# Altium PCB PCBGame.PcbDoc
Units mil, origin at the board's own origin, x right, y up, seen from the top; angles counter-clockwise.
Board outline 4244.09 x 3937.01 mil, 2 copper layers (Top Layer, Bottom Layer), stack 61.811 mil thick; 24 components, 35 nets, 183 pads, 51 vias.
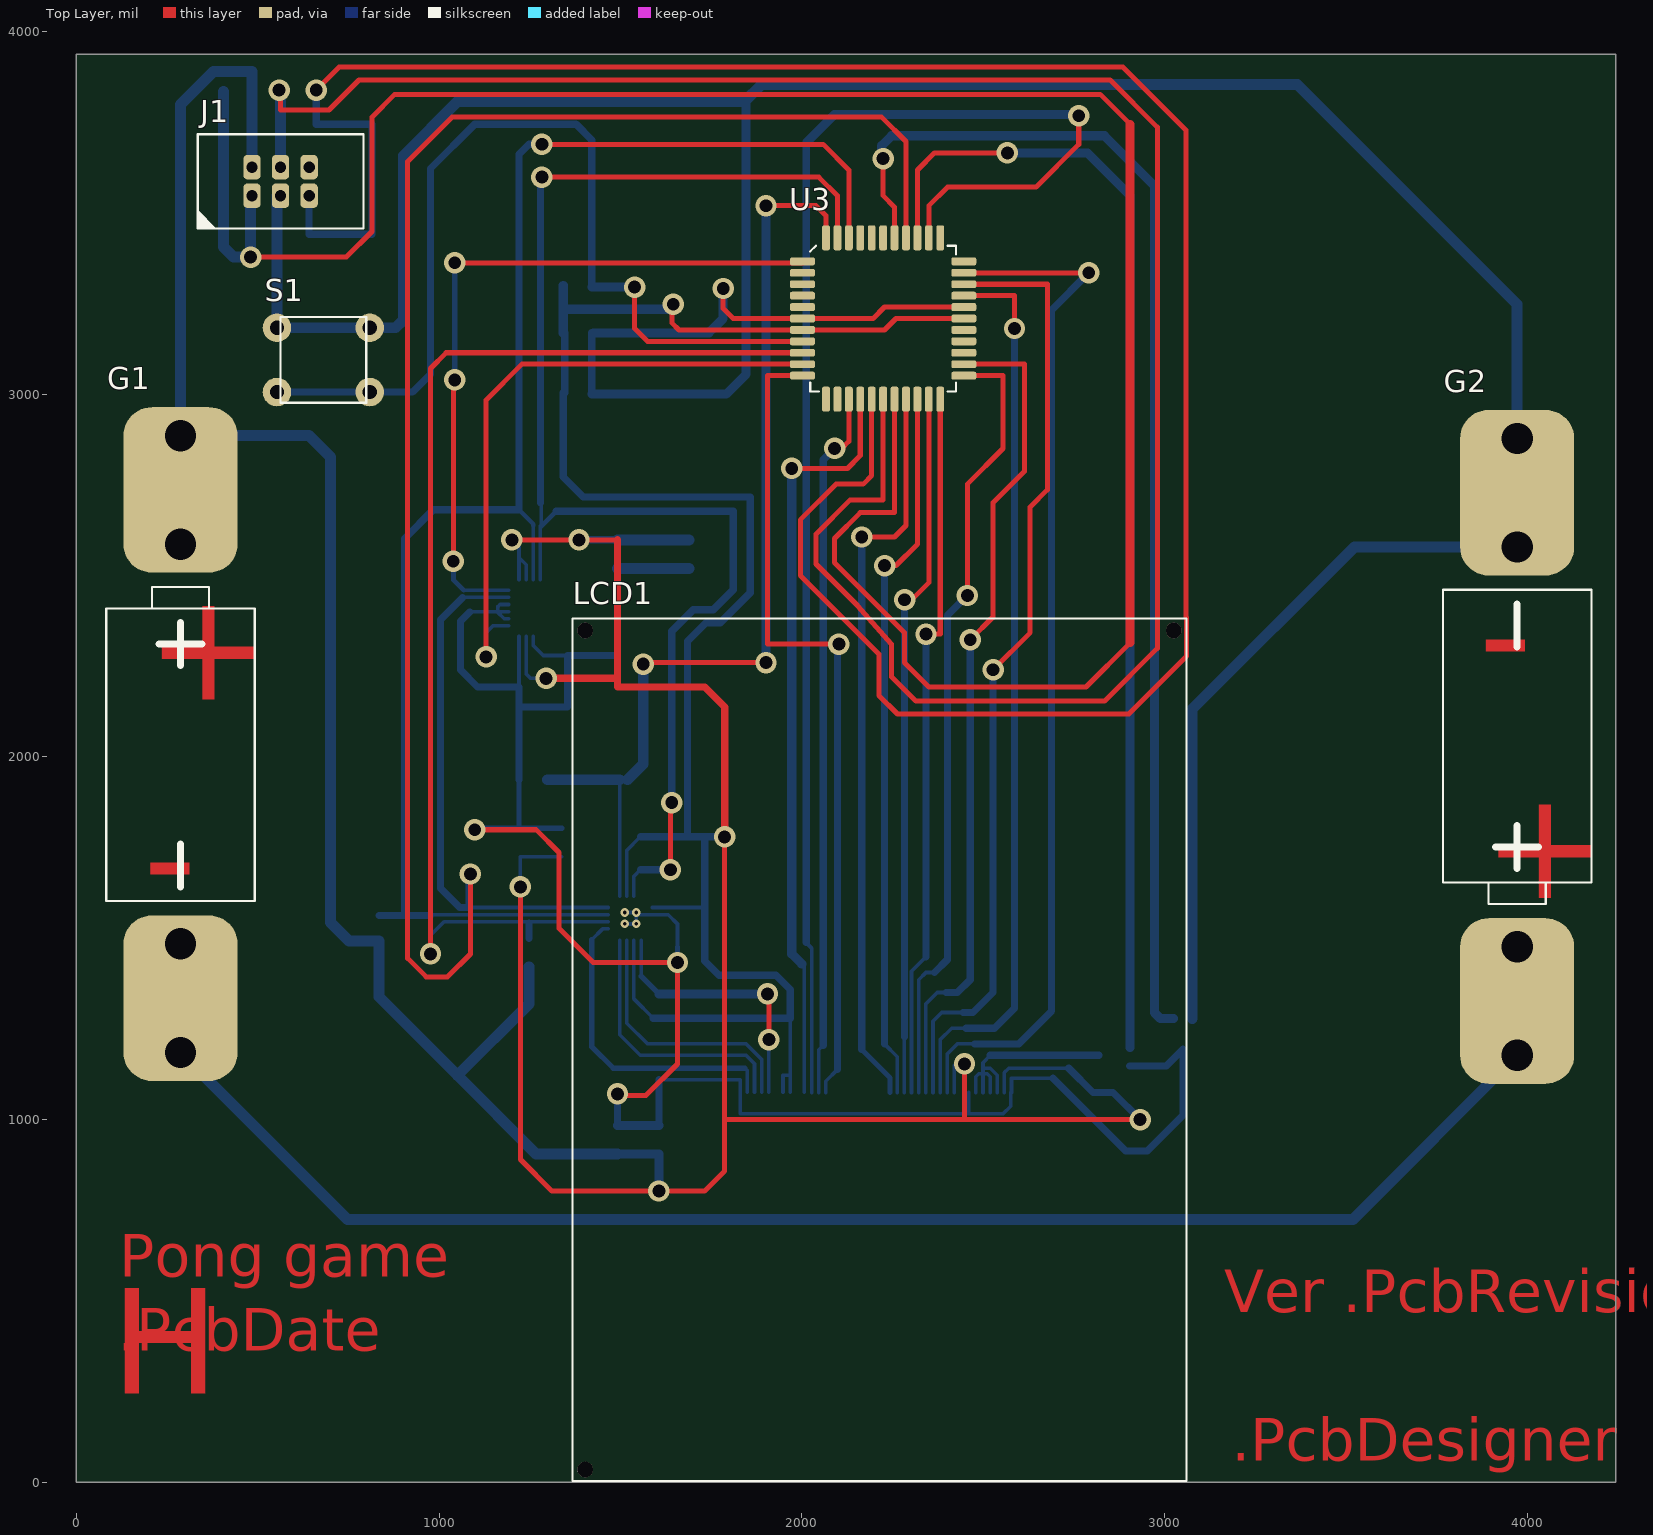
[diagram p0: Top Layer view]
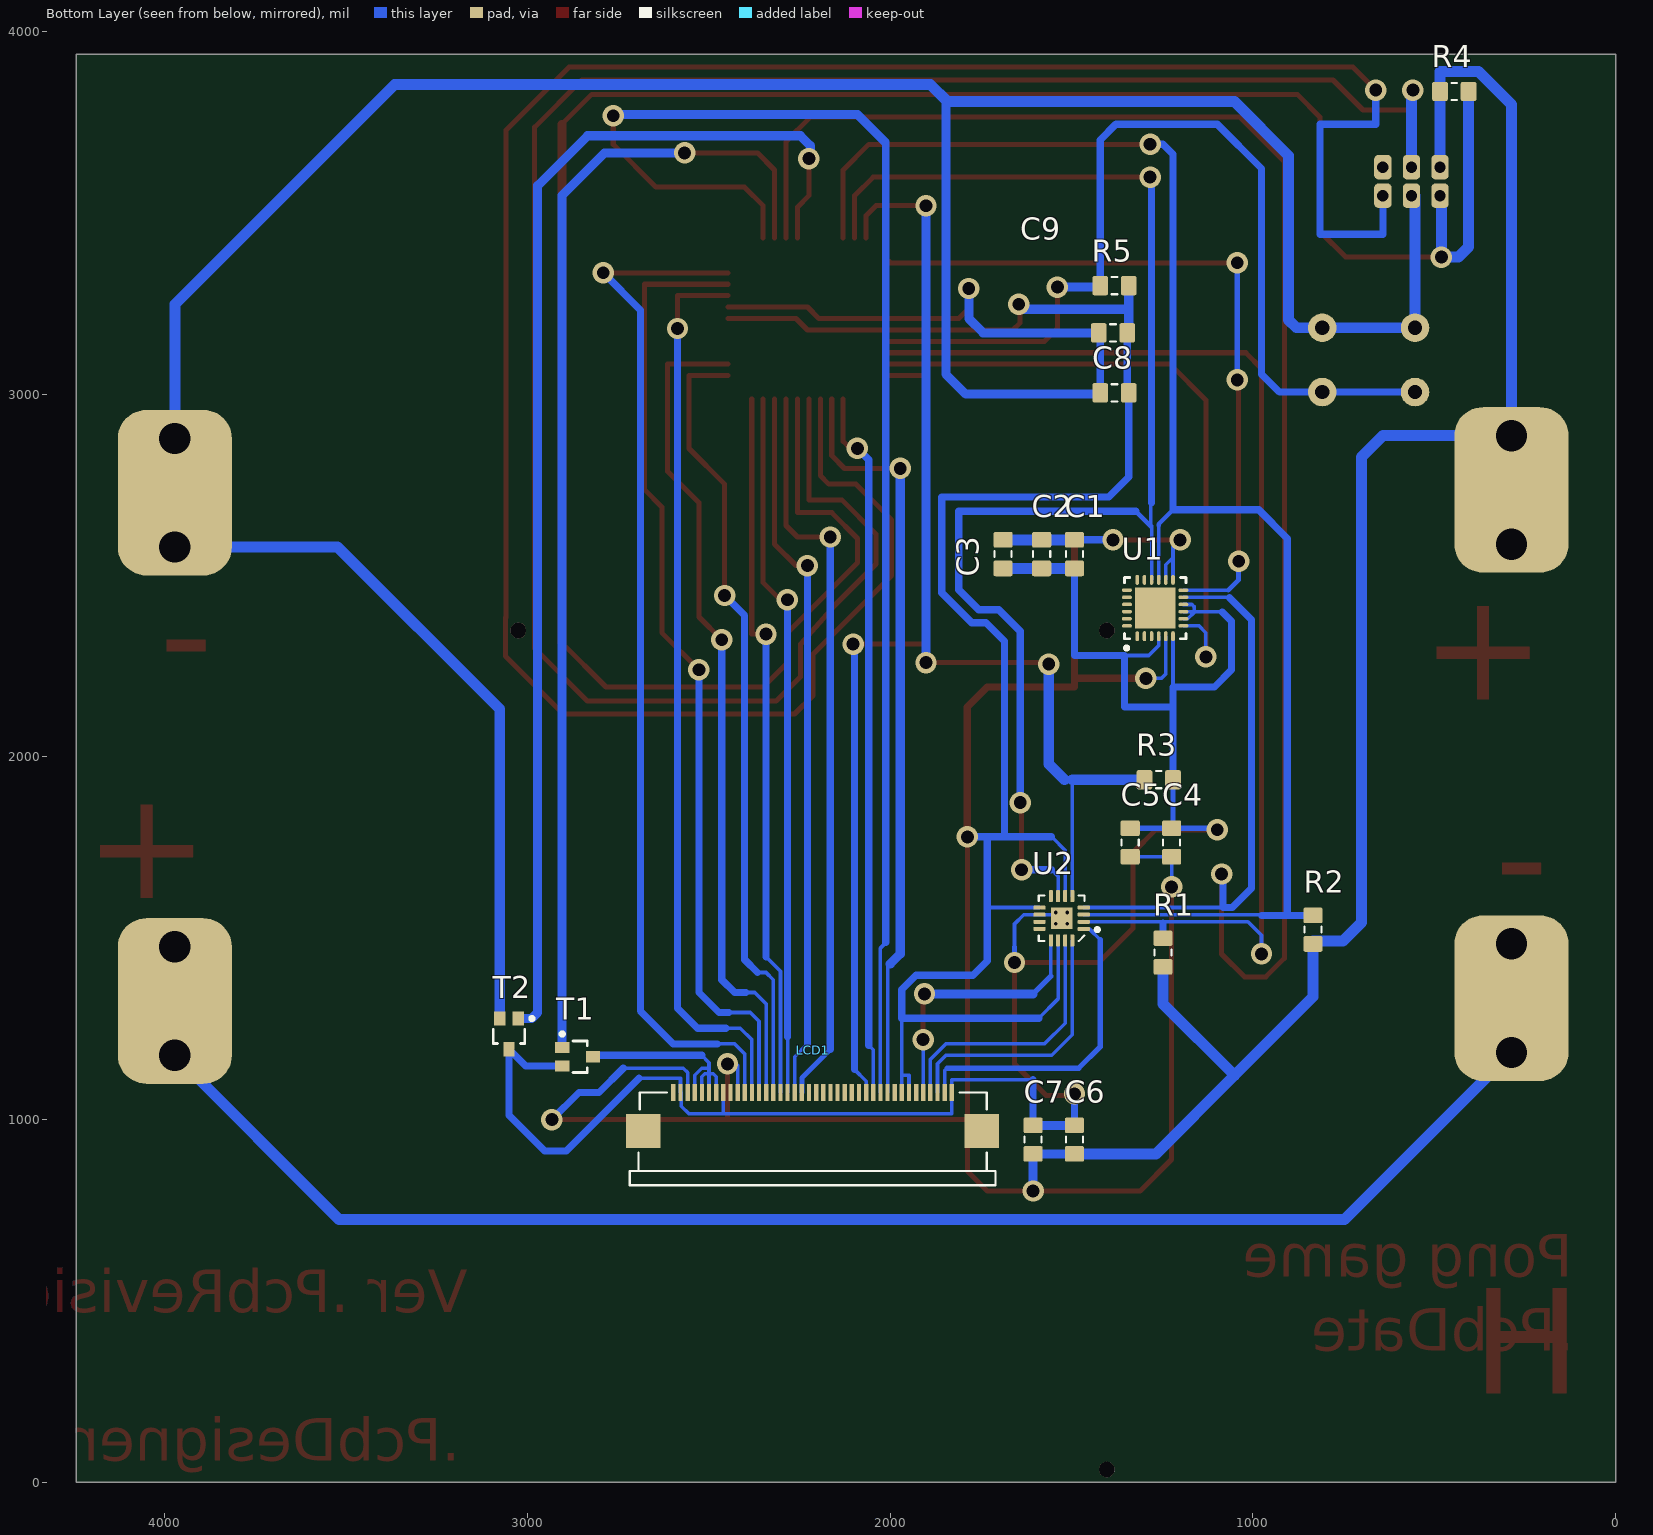
[diagram p1: Bottom Layer view, seen from below]

## Layer stack, top to bottom
Top Layer: signal copper 1.378
Dielectric 1: core 59.0551, FR-4, Dk 4.2
Bottom Layer: signal copper 1.378

## Board outline
0,0 4244.09,0 4244.09,3937.01 0,3937.01

## Design rules (kind name [scope] priority, off if disabled: settings)
AcuteAngle [All] p1: minimum=9.00000000000000E+0001 checktracksonly=TRUE
AssemblyTestPointUsage [All] p1 off:
AssemblyTestpoint [All] p1 off: testpointundercomponent=TRUE minsize=40 maxsize=100 preferedsize=60 minholesize=0 maxholesize=40 preferedholesize=32 testpointgrid=1 usegrid=TRUE gridtolerance=0.01 allowsidetop=TRUE allowsidebottom=TRUE
BoardOutlineClearance [All] p1 off: gap=9.84 ignorepadtopadclearanceinfootprint=FALSE
Clearance [All] p1: gap=0.2 ignorepadtopadclearanceinfootprint=FALSE except(0: Arc-Hole Track-Hole SMDPad-Hole THPad-Hole Via-Hole Fill-Hole Poly-Hole Region-Hole Text-Hole)
ComponentClearance [All] p1 off: gap=9.84 collisioncheckmode=3 verticalgap=9.84 showdistances=FALSE
DiffPairsRouting [All] p1 off: maxlimit=10 minlimit=10 mostfreqgap=10 toplayer_minwidth=15 toplayer_maxwidth=15 toplayer_prefwidth=15 bottomlayer_minwidth=15 bottomlayer_maxwidth=15 bottomlayer_prefwidth=15 maxuncoupledlength=500
FabricationTestPointUsage [All] p1 off: valid=0 allowmultiple=FALSE
FabricationTestpoint [All] p1 off: side=3 testpointundercomponent=TRUE minsize=40 maxsize=100 preferedsize=60 minholesize=0 maxholesize=40 preferedholesize=32 testpointgrid=1 allowsidetop=TRUE allowsidebottom=TRUE usegrid=TRUE gridtolerance=0.01
FanoutControl Fanout_BGA [IsBGA] p1 off: bgadir=Out bgaviamode=Centered fanoutstyle=Auto fanoutdirection=Alternating viagrid=1 // Fanout_BGA (Default Rule)
FanoutControl Fanout_LCC [IsLCC] p2 off: bgadir=Out bgaviamode=Centered fanoutstyle=Auto fanoutdirection=Alternating viagrid=1 // Fanout_LCC (Default Rule)
FanoutControl Fanout_SOIC [IsSOIC] p3 off: bgadir=Out bgaviamode=Centered fanoutstyle=Auto fanoutdirection=Alternating viagrid=1 // Fanout_SOIC (Default Rule)
FanoutControl Fanout_Small [(CompPinCount < 5)] p4 off: bgadir=Out bgaviamode=Centered fanoutstyle=Auto fanoutdirection=OutThenIn viagrid=1 // Fanout_Small (Default Rule)
FanoutControl Fanout_Default [All] p5 off: bgadir=Out bgaviamode=Centered fanoutstyle=Auto fanoutdirection=Alternating viagrid=1 // Fanout_Default (Default Rule)
Height [All] p1 off: minheight=0 maxheight=1000 prefheight=500
HoleSize [All] p1 off: absolutevalues=TRUE maxlimit=118.11 minlimit=5.91 maxpercent=80.000 minpercent=20.000
HoleToHoleClearance [All] p1 off: gap=9.84 allowstackedmicrovias=TRUE
LayerPairs [All] p1 off: enforce=TRUE
MinimumAnnularRing [All] p1 off: minimumring=13.78
MinimumSolderMaskSliver [All] p1 off: minsoldermaskwidth=0
PasteMaskExpansion [All] p1 off: expansion=0
PlaneClearance [All] p1: clearance=9.84
PlaneConnect [All] p1 off: planeconnectstyle=Relief reliefexpansion=19.68 reliefentries=4 reliefconductorwidth=9.84 reliefairgap=9.84
PolygonConnect [All] p1 off: connectstyle=Relief reliefconductorwidth=9.84 reliefentries=4 polygonreliefangle="90 Angle" airgapwidth=9.84
RoutingCorners [All] p1 off: cornerstyle=45-Degree minsetback=98.43 maxsetback=98.43
RoutingLayers [All] p1 off: top layer_v5=TRUE bottom layer_v5=TRUE
RoutingPriority [All] p1 off: routingpriority=0
RoutingTopology [All] p1 off: topology=Shortest
RoutingVias [All] p1: holewidth=35.43 width=59.06 viastyle="Through Hole" minholewidth=35.43 minwidth=59.06 maxholewidth=35.43 maxwidth=59.06
SilkToBoardRegionClearance [All] p1 off:
SilkToSilkClearance [All] p1 off: silktosilkclearance=0
SilkToSolderMaskClearance [IsPad] p1 off: minsilkscreentomaskgap=0 clearancetoexposedcopper=TRUE
SolderMaskExpansion [All] p1 off: expansion=0
Width [All] p1: maxlimit=157.48 minlimit=5.91 preferedwidth=9.84
4 further rules are at their usual default settings.

## Components (designator, comment, footprint, x,y, rotation, side; value= is the part's Value field where it differs from the comment)
C1 "100nF" "CAPACITOR 2012 REFLOW" 1492.13,2559.06 r90 bottom
C2 "100nF" "CAPACITOR 2012 REFLOW" 1582.68,2559.06 r90 bottom
C3 "100nF" "CAPACITOR 2012 REFLOW" 1688.98,2559.06 r90 bottom
C4 "100nF" "CAPACITOR 2012 REFLOW" 1224.41,1763.78 r270 bottom
C5 "100nF" "CAPACITOR 2012 REFLOW" 1338.58,1763.78 r270 bottom
C6 "100nF" "CAPACITOR 2012 REFLOW" 1492.13,944.88 r270 bottom
C7 "100nF" "CAPACITOR 2012 REFLOW" 1606.3,944.88 r270 bottom
C8 "100nF" "CAPACITOR 2012 REFLOW" 1381.89,3003.94 r180 bottom
C9 "100nF" "CAPACITOR 2012 REFLOW" 1385.83,3169.29 r180 bottom
G1 "Battery cell D10.5 L44.5" "1.5V Cell AAA/LR03" 287.23,2035.43 r270 top
G2 "Battery cell D10.5 L44.5" "1.5V Cell AAA/LR03" 3972.44,2027.56 r90 top
J1 "FlatCable2x3" "FlatCable2x3 2MM Straight TH FCI 98414-G06-06ULF" 562.99,3586.61 r0 top
LCD1 "LCD-NHD-2.4-240320SF" LCD-NHD-2.4-240320SF 2214.17,1074.8 r0 top
R1 "10k" "RESISTOR 2012 REFLOW" 1248.03,1460.63 r270 bottom
R2 "10k" "RESISTOR 2012 REFLOW" 834.65,1523.62 r270 bottom
R3 "10k" "RESISTOR 2012 REFLOW" 1259.84,1937.01 r0 bottom
R4 "10k" "RESISTOR 2012 REFLOW" 444.88,3834.65 r0 bottom
R5 "10k" "RESISTOR 2012 REFLOW" 1381.89,3299.21 r180 bottom
S1 "User" "Push Button C6.0x6.0 WE 430186130716" 681.1,3094.49 r180 top
T1 "PMF370XN" SOT65P210X110-3N 2862.2,1173.23 r180 bottom
T2 "PMF370XN" SOT65P210X110-3N 3051.18,1236.22 r270 bottom
U1 "Component_1" accelerometer 1269.68,2410.43 r90 bottom
U2 "STMPE811" "QFN16 P0.5 T1.5x1.5 C3.0x3.0 H1.0" 1527.56,1555.12 r0 bottom
U3 "PIC18F46K20-_/PT" "TQFP44 P0.8 C10X10 H1.2" 2224.41,3208.66 r0 top

## Footprints (in the part's own frame and the unit in brackets; to place one, negate y for a bottom-side part, rotate by r counter-clockwise, add the part's x,y. Pads: shape width x height; smd on the part's side, far side on the other; paste and mask are expansions set on the pad)
"1.5V Cell AAA/LR03" [mm] "Battery Cell D10.5 L44.5"
  rrect50% 8x8 hole 2.2 copper offset 2,0: 1(-21.6,0) 2(14,0)
  rrect50% 8x8 hole 2.2 copper offset -2,0: 1(-14,0) 2(21.6,0)
  silkscreen extent -11,-5.2 11,5.2, body extent -24,-5.4 24,5.4, height 13.5
accelerometer [mm] "QFN, 24-Leads, Body 4.00x4.00mm, Pitch 0.50mm, Thermal Pad 2.85x2.85mm, IPC Medium Density"
  oval 0.7x0.25 smd: 1(-1.975,1.25) 2(-1.975,0.75) 3(-1.975,0.25) 4(-1.975,-0.25) 5(-1.975,-0.75) 6(-1.975,-1.25) 13(1.975,-1.25) 14(1.975,-0.75) 15(1.975,-0.25) 16(1.975,0.25) 17(1.975,0.75) 18(1.975,1.25)
  oval 0.25x0.7 smd: 7(-1.25,-1.975) 8(-0.75,-1.975) 9(-0.25,-1.975) 10(0.25,-1.975) 11(0.75,-1.975) 12(1.25,-1.975) 19(1.25,1.975) 20(0.75,1.975) 21(0.25,1.975) 22(-0.25,1.975) 23(-0.75,1.975) 24(-1.25,1.975)
  rect 2.85x2.85 smd: 25(0,0)
  silkscreen extent -2.92,-2.15 2.15,2.15, body extent -2,-2 2,2, height 1.8
"CAPACITOR 2012 REFLOW" [mm] "Capacitor SMD 2.0x1.2mm (0805-imperial)"
  rrect25% 1.1x1.35 smd: 1(-1,0) 2(1,0)
  silkscreen extent -0.2,-0.6 0.2,0.6, body extent -1,-0.6 1,0.6, height 1
"FlatCable2x3 2MM Straight TH FCI 98414-G06-06ULF" [mm] "FlatCable2x3 2MM Straight TH FCI 98414-G06-06ULF"
  rrect50% 1.219x1.727 hole 0.8: 1(-2,-1) 2(-2,1) 3(0,-1) 4(0,1) 5(2,-1) 6(2,1)
  silkscreen extent -5.8,-3.3 5.8,3.3, body extent -4,-3 4,3, height 5.9
LCD-NHD-2.4-240320SF [mm] "LCD-NHD-2.4-240320SF"
  round 1.1 hole 1.1 paste-25.4 mask-25.4: 0(-20.61,-26.41) 0(-20.61,32.35) 0(20.61,32.35)
  rect 2.4x2.4 smd far side: 0(-11.85,-2.7) 0(11.86,-2.7)
  rect 0.3x1.2 smd far side: 1(-9.75,0) 2(-9.25,0) 3(-8.75,0) 4(-8.25,0) 5(-7.75,0) 6(-7.25,0) 7(-6.75,0) 8(-6.25,0) 9(-5.75,0) 10(-5.25,0) 11(-4.75,0) 12(-4.25,0) 13(-3.75,0) 14(-3.25,0) 15(-2.75,0) 16(-2.25,0) 17(-1.75,0) 18(-1.25,0) 19(-0.75,0) 20(-0.25,0) 21(0.25,0) 22(0.75,0) 23(1.25,0) 24(1.75,0) 25(2.25,0) 26(2.75,0) 27(3.25,0) 28(3.75,0) 29(4.25,0) 30(4.75,0) 31(5.25,0) 32(5.75,0) 33(6.25,0) 34(6.75,0) 35(7.25,0) 36(7.75,0) 37(8.25,0) 38(8.75,0) 39(9.25,0) 40(9.75,0)
  silkscreen extent -21.5,-27.2 21.5,33.2, body extent -21.43,-27.17 21.43,33.18, height 3.87
"Push Button C6.0x6.0 WE 430186130716" [mm] "Push Button Wurth Elektronik 430186130716"
  round 2 hole 1: 1(-3.25,2.25) 2(-3.25,-2.25) 3(3.25,2.25) 4(3.25,-2.25)
  silkscreen extent -3,-3 3,3, body extent -3.4,-3.1 3.4,3.1, height 15
"QFN16 P0.5 T1.5x1.5 C3.0x3.0 H1.0" [mm] "QFN16 P0.5 T1.5x1.5 C3.0x3.0 H1.0"
  rrect50% 0.85x0.28 smd: 1(-1.55,0.75) 2(-1.55,0.25) 3(-1.55,-0.25) 4(-1.55,-0.75) 9(1.55,-0.75) 10(1.55,-0.25) 11(1.55,0.25) 12(1.55,0.75)
  rrect50% 0.28x0.85 smd: 5(-0.75,-1.55) 6(-0.25,-1.55) 7(0.25,-1.55) 8(0.75,-1.55) 13(0.75,1.55) 14(0.25,1.55) 15(-0.25,1.55) 16(-0.75,1.55)
  rect 1.5x1.5 smd: 17(0,0)
  silkscreen extent -2.62,-1.6 1.6,1.6, body extent -1.5,-1.5 1.5,1.5, height 1.01
"RESISTOR 2012 REFLOW" [mm] "Resistor SMD 2.0x1.2mm (0805-imperial)"
  rrect25% 1.1x1.35 smd: 1(-1,0) 2(1,0)
  silkscreen extent -0.2,-0.6 0.2,0.6, body extent -1,-0.6 1,0.6, height 0.6
SOT65P210X110-3N [mm] "SOT23, 3-Leads, Body 2.00x2.10mm, Pitch 0.65mm, IPC Medium Density"
  rect 1x0.8 smd: 1(-1.075,0.65) 2(-1.075,-0.65) 3(1.075,0)
  silkscreen extent -1.2,-1.1 0.67,1.72, body extent -0.67,-1.1 0.67,1.1, height 1.1
"TQFP44 P0.8 C10X10 H1.2" [mm] "Thin QFP, 44-Leads, Body 10x10mm, Pitch 0.8mm, IPC Medium Density"
  rrect50% 1.75x0.55 smd: 1(-5.65,4) 2(-5.65,3.2) 3(-5.65,2.4) 4(-5.65,1.6) 5(-5.65,0.8) 6(-5.65,0) 7(-5.65,-0.8) 8(-5.65,-1.6) 9(-5.65,-2.4) 10(-5.65,-3.2) 11(-5.65,-4) 23(5.65,-4) 24(5.65,-3.2) 25(5.65,-2.4) 26(5.65,-1.6) 27(5.65,-0.8) 28(5.65,0) 29(5.65,0.8) 30(5.65,1.6) 31(5.65,2.4) 32(5.65,3.2) 33(5.65,4)
  rrect50% 0.55x1.75 smd: 12(-4,-5.65) 13(-3.2,-5.65) 14(-2.4,-5.65) 15(-1.6,-5.65) 16(-0.8,-5.65) 17(0,-5.65) 18(0.8,-5.65) 19(1.6,-5.65) 20(2.4,-5.65) 21(3.2,-5.65) 22(4,-5.65) 34(4,5.65) 35(3.2,5.65) 36(2.4,5.65) 37(1.6,5.65) 38(0.8,5.65) 39(0,5.65) 40(-0.8,5.65) 41(-1.6,5.65) 42(-2.4,5.65) 43(-3.2,5.65) 44(-4,5.65)
  silkscreen extent -5.1,-5.1 5.1,5.1, body extent -5,-5 5,5, height 1.21

## Part data
C1 C2 C3 C4 C5 C6 C7 C8 C9: library part Capacitor, "Capacitor"
G1 G2: library part Battery, "Battery Generic", Supplier Part Number 1=36-82-ND, Supplier 1=Digi-Key
LCD1: "NEWHEAVEN LCD", Supplier Part Number 1=NHD-2.4-240320CF-CTXI#-F-ND, Supplier 1=Digi-Key
R1 R2 R3 R4 R5: library part Resistor, "Resistor"
S1: library part "Push Button 4Pins", "Push Button, 4 pins, 2 poles parrallèle", Supplier Part Number 1=401-1433-ND, Supplier 1=Digi-Key
T1: library part Component_2
T2: library part Component_2, Supplier Part Number 1=1758096, Supplier 1=Farnell
U2: library part STMPE811Q, "Advanced resistive touch screen controller  with 8-bit GPIO expander", Supplier Part Number 1=2807110, Supplier 1=Farnell
U3: "Flash Microcontrollers  with 10-Bit A/D and nanoWatt Technology", Supplier Part Number 1=1439591, Supplier 1=Farnell

## Via types
v1: diameter 59.06, hole 35.43, Top Layer to Bottom Layer, 47 vias
v2: diameter 23.62, hole 9.84, Top Layer to Bottom Layer, 4 vias

## Nets (pads, with @x,y where several pads share a name; then routed paths per layer and width w, separated by ;. In a path a pad name is that pad's centre, name@x,y a point inside that pad or via, vN(x,y) a via of type N, cw(c..) or ccw(c..) an arc to the next point about the centre after c; other vN are vias at no path point)
CTRL_GND: C1.1 C2.1 C3.1 C4.1 C5.1 C6.1 C7.1 LCD1.1 LCD1.33 LCD1.39 R3.1 T1.2 T2.3 U1.4 U1.6 U1.8 U1.9 U1.10 U2.10 U2.17 | length 6425.8
  Top Layer w14: v1(1098.43,1799.21) 1267.72,1799.21 1330.71,1736.22 1330.71,1527.56 1425.2,1433.07 v1(1657.48,1433.07) ; v1(1492.13,1070.87) 1492.13,1066.93 1570.87,1066.93 1657.48,1153.54
  Top Layer w15: 1657.48,1153.54 v1(1657.48,1433.07)
  Bottom Layer w9.84: 1084.65,2399.61 1161.42,2399.61 1161.42,2413.39 1167.32,2419.29 ; 1261.81,2305.12 1287.4,2279.53 1354.33,2279.53 ; U2.17@1543.31,1564.96 U2.10 1631.89,1564.96 1657.48,1539.37 1657.48,1476.38
  Bottom Layer w10: 1167.32,2419.29 1168.31,2420.28 U1.10 ; U1.8 1180.12,2380.91 1161.42,2399.61 1162.4,2400.59 U1.9 ; 1220.47,2192.91 U1.6 ; U1.4 1259.84,2307.09 1261.81,2305.12 ; v2(1511.81,1539.37) v2(1543.31,1539.37) 1543.31,1564.96 v2(1543.31,1570.87) v2(1511.81,1570.87) ; 1606.3,1110.24 1830.31,1110.24 LCD1.1 1830.31,1015.75 2460.24,1015.75 ; LCD1.33 2460.24,1015.75 ; 2692.91,1114.17 2578.35,1114.17 LCD1.39 2576.44,1074.8 2576.44,1037.07 2555.12,1015.75 2460.24,1015.75
  Bottom Layer w14: v1(1098.43,1799.21) 1098.43,1803.15 C4.1@1220.47,1803.15 ; R3.1 C4.1@1220.47,1803.15 ; C5.1 C4.1 C4.1@1220.47,1803.15 ; v1(1657.48,1433.07) 1657.48,1476.38
  Bottom Layer w20: 1084.65,2399.61 1059.06,2374.02 1059.06,2240.16 1106.3,2192.91 1220.47,2192.91 1220.47,2137.8 ; R3.1 1220.47,2047.24 1220.47,2137.8 ; C6.1 v1(1492.13,1070.87) ; C1.1 1492.13,2279.53 1354.33,2279.53 1354.33,2137.8 1220.47,2137.8 ; C7.1 1606.3,1110.24 ; 2692.91,1114.17 2893.7,913.39 2952.76,913.39 3051.18,1011.81 T2.3 3004.92,1147.64 T1.2
  Bottom Layer w25: C6.1 C7.1
  Bottom Layer w30: C1.1 C2.1 C3.1
GND: C8.1 C9.1 G2.2 J1.3 S1.2 S1.4 T2.2 U3.6 U3.29 | length 9768.5
  Top Layer w14: v1(1783.46,3291.34) 1783.46,3236.22 1811.02,3208.66 U3.6 2196.85,3208.66 2228.35,3240.16 U3.29
  Bottom Layer w14: J1.3@553.15,3547.24 J1.3 ; C8.1@1421.26,3000 C8.1 ; C9.1@1421.26,3169.29 C9.1 ; 1842.52,3807.09 1846.46,3807.09 ; G2.2@3972.44,2578.74 G2.2@3972.44,2877.95
  Bottom Layer w20: C8.1 C9.1@1421.26,3169.29
  Bottom Layer w25: C8.1@1421.26,3000 1791.34,3000 1846.46,3055.12 1846.46,3807.09 ; C9.1 1744.09,3169.29 1783.46,3208.66 v1(1783.46,3291.34)
  Bottom Layer w30: J1.3@553.15,3547.24 S1.4 S1.2 879.92,3183.07 901.57,3204.72 901.57,3657.48 1051.18,3807.09 1842.52,3807.09 1889.76,3854.33 3366.14,3854.33 3972.44,3248.03 G2.2@3972.44,2877.95 ; T2.2 3076.77,2131.89 3523.62,2578.74 G2.2@3972.44,2578.74
NetG1_2: G1.2 G2.1 | length 4362.8
  Bottom Layer w14: G2.1@3972.44,1177.17 G2.1@3972.44,1476.38
  Bottom Layer w30: G1.2@287.23,1185.04 747.86,724.41 3519.68,724.41 G2.1@3972.44,1177.17
NetJ1_1: J1.1 R4.1 U3.18 | length 6578
  Top Layer w14: v1(480.31,3377.95) 744.09,3377.95 814.96,3448.82 814.96,3763.78 877.95,3826.77 2822.83,3826.77 2905.51,3744.09 ; U3.18 2255.9,2673.23 2161.42,2673.23 2090.55,2602.36 2090.55,2535.43 2283.46,2342.52 2283.46,2259.84 2350.39,2192.91 2783.46,2192.91 2905.51,2314.96
  Top Layer w25: 2905.51,2314.96 2905.51,3744.09
  Bottom Layer w14: J1.1@480.31,3547.24 J1.1
  Bottom Layer w30: R4.1 405.51,3405.51 433.07,3377.95 v1(480.31,3377.95) J1.1@480.31,3547.24
NetJ1_4: J1.4 U3.17 | length 6017
  Top Layer w14: v1(559.06,3838.58) 562.99,3838.58 562.99,3783.46 696.85,3783.46 779.53,3866.14 2850.39,3866.14 2980.31,3736.22 2980.31,2299.21 2834.65,2153.54 2314.96,2153.54 2248.03,2220.47 2248.03,2311.02 2153.54,2417.32 2039.37,2531.5 2039.37,2614.17 2133.86,2708.66 2224.41,2708.66 U3.17
  Bottom Layer w14: v1(559.06,3838.58) v1@562.99,3838.58
  Bottom Layer w30: J1.4 v1@562.99,3838.58
NetJ1_5: J1.5 U3.16 | length 6746.7
  Top Layer w14: v1(661.42,3838.58) 724.41,3901.57 2885.83,3901.57 3059.06,3728.35 3059.06,2383.95 3061.12,2383.95 3061.12,2277.65 2901.57,2118.11 2263.78,2118.11 2212.6,2169.29 2212.6,2283.46 1996.06,2500 1996.06,2653.54 2094.49,2751.97 2169.29,2751.97 2192.91,2775.59 U3.16
  Bottom Layer w20: J1.5 641.73,3440.94 814.96,3440.94 814.96,3744.09 661.42,3744.09 v1(661.42,3838.58)
NetLCD1_2: LCD1.2 U2.1 | length 869.1
  Bottom Layer w9.84: 1421.26,1496.06 1450.79,1525.59 U2.1 ; 1843.5,1141.73 1850,1135.24 LCD1.2
  Bottom Layer w15: 1421.26,1496.06 1421.26,1200.79 1480.31,1141.73 1843.5,1141.73
NetLCD1_3: LCD1.3 U2.16 | length 743.9
  Bottom Layer w9.84: U2.16 1498.03,1234.25 1555.12,1177.17 1846.46,1177.17 1869.68,1153.94 LCD1.3
NetLCD1_4: LCD1.4 U2.15 | length 732.4
  Bottom Layer w9.84: U2.15 1517.72,1265.75 1574.8,1208.66 1846.46,1208.66 1889.37,1165.75 LCD1.4
NetLCD1_5: LCD1.5 U2.13 | length 743.2
  Top Layer w14: v1(1905.51,1346.46) 1909.45,1346.46 v1(1909.45,1220.47)
  Bottom Layer w9.84: 1557.09,1395.67 U2.13 ; LCD1.5 1909.45,1074.8 v1(1909.45,1220.47)
  Bottom Layer w15: 1557.09,1395.67 1606.3,1346.46
  Bottom Layer w25: 1606.3,1346.46 v1(1905.51,1346.46)
NetLCD1_10: LCD1.10 U3.15 | length 2094.2
  Top Layer w14: v1(1972.44,2795.28) 2125.98,2795.28 2161.42,2830.71 U3.15
  Bottom Layer w9.84: 2000,1429.13 2007.48,1421.65 LCD1.10
  Bottom Layer w25: v1(1972.44,2795.28) 1972.44,1456.69 2000,1429.13
NetLCD1_11: LCD1.11 U3.35 | length 4063.8
  Top Layer w14: U3.35 2350.39,3519.69 2401.57,3570.87 2645.67,3570.87 2763.78,3688.98 v1(2763.78,3767.72)
  Bottom Layer w9.84: v1(2763.78,3767.72) v1@2763.78,3771.65
  Bottom Layer w10: 2011.81,1488.19 2027.16,1472.84 LCD1.11
  Bottom Layer w20: 2011.81,1488.19 2012.17,1488.55 2012.17,3693.27 2014.67,3695.77
  Bottom Layer w25: 2014.67,3695.77 2090.55,3771.65 v1@2763.78,3771.65
NetLCD1_12: LCD1.12 U3.14 | length 1957.4
  Top Layer w14: v1(2090.55,2850.39) 2110.24,2850.39 2129.92,2870.08 2129.92,2885.83 U3.14
  Bottom Layer w10: LCD1.12 2046.85,1192.52 2059.06,1204.72
  Bottom Layer w20: 2059.06,1204.72 2059.06,2818.9 v1(2090.55,2850.39)
NetLCD1_13: LCD1.13 U3.11 | length 2294.7
  Top Layer w14: U3.11 1905.51,3051.18 1905.51,2311.02 v1(2102.36,2311.02)
  Bottom Layer w10: LCD1.13 2066.53,1105.9 2098.43,1137.8
  Bottom Layer w14: v1@2098.43,2314.96 2102.36,2314.96 v1(2102.36,2311.02)
  Bottom Layer w20: 2098.43,1137.8 v1@2098.43,2314.96
NetLCD1_22: LCD1.22 U3.19 | length 2047.5
  Top Layer w14: v1(2165.35,2606.3) 2255.91,2606.3 2287.4,2637.8 U3.19
  Bottom Layer w14: 2165.35,1192.91 2243.7,1114.57 LCD1.22
  Bottom Layer w20: 2165.35,1192.91 v1(2165.35,2606.3)
NetLCD1_23: LCD1.23 U3.20 | length 2001.6
  Top Layer w14: v1(2228.35,2527.56) 2259.84,2527.56 2318.9,2586.62 U3.20
  Bottom Layer w10: 2228.35,1208.66 2263.38,1173.62 LCD1.23 ; v1(2228.35,2527.56) v1@2248.03,2527.56
  Bottom Layer w20: 2228.35,1208.66 v1(2228.35,2527.56)
NetLCD1_24: LCD1.24 U3.21 | length 1951.1
  Top Layer w14: v1(2283.46,2433.07) 2303.15,2433.07 2350.39,2480.32 U3.21
  Bottom Layer w10: LCD1.24 2283.07,1228.35 2283.46,1228.35
  Bottom Layer w20: 2283.46,1228.35 v1(2283.46,2433.07)
NetLCD1_25: LCD1.25 U3.22 | length 1967.3
  Top Layer w14: v1(2342.52,2338.58) 2381.89,2338.58 U3.22
  Bottom Layer w10: LCD1.25 2302.75,1409.05 2342.52,1448.82
  Bottom Layer w20: 2342.52,1448.82 v1(2342.52,2338.58)
NetLCD1_26: LCD1.26 U3.23 | length 2194.9
  Top Layer w14: U3.23 2555.12,3051.18 2555.12,2850.39 2456.69,2751.97 v1(2456.69,2444.88)
  Bottom Layer w10: LCD1.26 2322.44,1385.43 2342.52,1405.51 2366.14,1405.51
  Bottom Layer w20: 2366.14,1405.51 2401.57,1440.94 2401.57,2389.76 v1(2456.69,2444.88)
NetLCD1_27: LCD1.27 U3.24 | length 2320.2
  Top Layer w14: U3.24 2614.17,3082.68 2614.17,2787.4 2527.56,2700.79 2527.56,2385.83 v1(2464.57,2322.83)
  Bottom Layer w10: LCD1.27 2342.12,1318.5 2374.02,1350.39 2397.64,1350.39
  Bottom Layer w20: 2397.64,1350.39 2429.13,1350.39 2464.57,1385.83 v1(2464.57,2322.83)
NetLCD1_28: LCD1.28 U3.31 | length 2644
  Top Layer w14: U3.31 2677.17,3303.15 2677.17,2736.22 2629.92,2688.98 2629.92,2342.52 v1(2527.56,2240.16)
  Bottom Layer w10: LCD1.28 2361.81,1271.26 2385.83,1295.28 2444.88,1295.28
  Bottom Layer w14: v1@2523.62,2240.16 v1(2527.56,2240.16)
  Bottom Layer w20: 2444.88,1295.28 2472.44,1295.28 2527.56,1350.39 v1(2527.56,2240.16)
NetLCD1_29: LCD1.29 U3.30 | length 2490.8
  Top Layer w14: U3.30 2586.61,3271.65 v1(2586.61,3181.1)
  Bottom Layer w10: LCD1.29 2381.49,1220.08 2413.39,1251.97 2452.76,1251.97
  Bottom Layer w20: 2452.76,1251.97 2531.5,1251.97 2586.61,1307.09 v1(2586.61,3181.1)
NetLCD1_30: LCD1.30 U3.32 | length 2865.1
  Top Layer w14: U3.32 v1(2791.34,3334.65)
  Bottom Layer w10: LCD1.30 2401.18,1180.71 2429.13,1208.66 2476.38,1208.66
  Bottom Layer w20: 2476.38,1208.66 2598.43,1208.66 2688.98,1299.21 2688.98,3232.28 v1(2791.34,3334.65)
NetLCD1_34: LCD1.34 LCD1.35 LCD1.36 LCD1.37 T1.3 | length 642.6
  Bottom Layer w10: LCD1.34 2479.92,1117.72 2488.19,1125.98 2499.61,1125.98 ; LCD1.35 2499.61,1125.98 ; LCD1.36 2519.29,1117.72 2519.68,1118.11 2511.81,1125.98 2499.61,1125.98 ; 2519.68,1177.17 2499.61,1157.09 2499.61,1141.73 ; LCD1.37 2538.98,1122.44 2519.68,1141.73 2499.61,1141.73 ; T1.3 T1.3@2819.88,1177.17 ; 2499.61,1125.98 2499.61,1141.73
  Bottom Layer w20: 2519.68,1177.17 T1.3@2819.88,1177.17
NetR1_1: R1.1 U2.2 U3.9 | length 3256.7
  Top Layer w14: v1(976.38,1456.69) 976.38,3070.87 1019.68,3114.17 U3.9
  Bottom Layer w9.84: v1(976.38,1456.69) 976.38,1507.87 1013.78,1545.27 U2.2
  Bottom Layer w20: R1.1 1248.03,1542.16
NetR2_1: R2.1 U1.15 U2.3 U3.42 | length 4351.5
  Top Layer w14: v1(1283.46,3688.98) 2059.06,3688.98 2129.92,3618.11 U3.42
  Bottom Layer w9.84: 976.38,1562.99 976.38,1564.96 U2.3 ; v1@1283.46,3685.04 v1(1283.46,3688.98)
  Bottom Layer w10: U1.15 1259.84,2637.8
  Bottom Layer w12: 1220.47,2681.1 1259.84,2641.73 1259.84,2637.8
  Bottom Layer w20: R2.1 905.51,1562.99 ; 976.38,1562.99 905.51,1562.99 ; v1(1283.46,3688.98) 1248.03,3688.98 1220.47,3661.42 1220.47,2681.1 984.25,2681.1 905.51,2602.36 905.51,1562.99
NetR3_2: R3.2 U2.5 U3.44 | length 2718.3
  Top Layer w14: v1(1562.99,2255.91) 1562.99,2259.84 v1(1901.57,2259.84) ; v1(1901.57,3519.68) 2039.37,3519.68 2066.93,3492.13 U3.44
  Bottom Layer w9.84: U2.5 1498.03,1937.01
  Bottom Layer w14: 1498.03,1937.01 1519.69,1937.01
  Bottom Layer w25: v1(1901.57,2259.84) v1(1901.57,3519.68)
  Bottom Layer w30: R3.2 1498.03,1937.01 ; 1519.69,1937.01 1562.99,1980.31 v1(1562.99,2255.91)
NetR5_1: R5.1 S1.1 S1.3 U3.8 | length 2639
  Top Layer w14: v1(1539.37,3295.28) 1539.37,3181.1 1574.8,3145.67 U3.8
  Bottom Layer w14: R5.1@1421.26,3295.28 R5.1
  Bottom Layer w20: S1.3 S1.1 927.17,3005.91 976.38,3055.12 976.38,3622.05 1098.43,3744.09 1377.95,3744.09 1421.26,3700.79 R5.1
  Bottom Layer w25: R5.1@1421.26,3295.28 v1(1539.37,3295.28)
NetT1_1: T1.1 U3.36 | length 3190.1
  Top Layer w14: U3.36 2318.9,3618.11 2366.14,3665.35 v1(2566.93,3665.35)
  Bottom Layer w25: v1(2566.93,3665.35) 2787.4,3665.35 2904.53,3548.23 T1.1
NetT2_1: T2.1 U3.38 | length 3438.9
  Top Layer w14: v1(2224.41,3649.61) 2224.41,3547.24 2255.9,3515.75 U3.38
  Bottom Layer w14: v1@2220.47,3645.67 2224.41,3645.67 v1(2224.41,3649.61)
  Bottom Layer w25: v1@2220.47,3645.67 2220.47,3685.04 2248.03,3712.6 2834.65,3712.6 2972.44,3574.8 2972.44,1295.28 2989.17,1278.54 T2.1
NetU1_7: U1.7 U3.10 | length 1758.2
  Top Layer w14: v1(1129.92,2275.59) 1129.92,2984.25 1228.35,3082.68 U3.10
  Bottom Layer w10: v1(1129.92,2275.59) 1129.92,2342.52 1148.62,2361.22 U1.7
NetU1_11: U1.11 U2.4 U3.37 | length 5890.8
  Top Layer w14: v1(1086.61,1677.17) 1086.61,1456.69 1023.62,1393.7 964.57,1393.7 913.39,1444.88 913.39,3641.73 1035.43,3763.78 2220.47,3763.78 2287.4,3696.85 U3.37
  Bottom Layer w9.84: 1064.96,2438.98 1065.94,2439.96 U1.11 ; 1082.68,1584.64 U2.4 ; v1@1082.68,1677.17 v1(1086.61,1677.17)
  Bottom Layer w20: 1064.96,2438.98 1003.94,2377.95 1003.94,1637.8 1057.09,1584.64 1082.68,1584.64 v1@1082.68,1677.17
NetU1_12: U1.12 U3.1 | length 2004.9
  Top Layer w14: v1(1039.37,2539.37) 1039.37,3039.37 v1(1043.31,3039.37) ; v1(1043.31,3362.2) 2001.97,3362.2 U3.1
  Bottom Layer w10: 1067.91,2459.65 U1.12
  Bottom Layer w12: 1039.37,2488.19 1067.91,2459.65
  Bottom Layer w14: 1039.37,2488.19 v1(1039.37,2539.37) ; v1(1043.31,3039.37) v1(1043.31,3362.2)
NetU1_16: U1.16 U2.7 U3.43 | length 3869.8
  Top Layer w14: v1(1283.46,3598.43) 2047.24,3598.43 2098.42,3547.24 U3.43 ; v1(1637.8,1688.98) 1637.8,1874.02 v1(1641.73,1874.02)
  Bottom Layer w9.84: U2.7 1537.4,1671.26 1555.12,1688.98
  Bottom Layer w10: U1.16 1279.53,2633.86 1281.5,2635.83 1281.5,2698.82 1279.53,2700.79
  Bottom Layer w14: 1281.5,2635.83 1322.83,2677.17
  Bottom Layer w20: 1279.53,2700.79 1279.53,3594.49 v1(1283.46,3598.43) ; 1322.83,2677.17 1811.02,2677.17 1811.02,2460.63 1755.91,2405.51 1700.79,2405.51 1641.73,2346.46 v1(1641.73,1874.02) ; 1555.12,1688.98 v1(1637.8,1688.98)
VCC: C1.2 C2.2 C3.2 C4.2 C5.2 C6.2 C7.2 C8.2 C9.2 G1.1 J1.2 LCD1.7 LCD1.8 LCD1.31 LCD1.38 R1.2 R2.2 R4.2 R5.2 U1.5 U1.13 U1.14 U2.6 U2.9 U2.14 U3.7 U3.28 | length 17192.1
  Top Layer w14: v1(1200.79,2598.43) v1(1385.83,2598.43) 1492.13,2598.43 ; v1(1224.41,1641.73) 1224.41,889.76 1311.02,803.15 v1(1606.3,803.15) 1732.28,803.15 1787.4,858.27 1787.4,1000 ; v1(1645.67,3248.03) 1641.73,3248.03 1641.73,3196.85 1661.42,3177.17 U3.7 2228.35,3177.17 2259.84,3208.66 U3.28 ; v1(1787.4,1779.53) 1787.4,1000 ; v1(2448.82,1153.54) 2448.82,1000 ; v1(2933.07,1000) 2448.82,1000 ; 1787.4,1000 2448.82,1000
  Top Layer w20: v1(1295.28,2216.54) 1492.13,2216.54 ; 1492.13,2598.43 1492.13,2216.54 ; v1(1787.4,1779.53) 1787.4,2137.8 1732.28,2192.91 1492.13,2192.91 1492.13,2216.54
  Bottom Layer w9.84: U2.6 1517.72,1742.13 1555.12,1779.53 ; U2.14 1537.4,1332.68 1590.55,1279.53 ; U2.9 1730.32,1584.64 1732.28,1582.68 ; LCD1.7 1948.42,1121.65 1948.82,1122.05 1968.11,1122.05 ; LCD1.8 1968.11,1122.05 ; 1968.11,1279.53 1968.11,1122.05
  Bottom Layer w10: v1(1200.79,2598.43) 1220.47,2578.74 1220.47,2545.28 ; U1.13 1220.47,2545.28 ; v1(1224.41,1641.73) C4.2 C5.2 ; U1.5 1240.16,2228.35 1251.97,2216.54 v1(1295.28,2216.54) ; U1.14 1240.16,2529.53 1222.44,2547.24 1220.47,2545.28 ; LCD1.31 v1@2420.86,1149.61 ; LCD1.38 2558.66,1129.53 2570.87,1141.73 2736.22,1141.73
  Bottom Layer w14: G1.1@287.23,2586.61 G1.1@287.23,2885.83 ; R2.2 R2.2@834.65,1492.13 ; C8.2 C8.2@1346.46,3003.94 ; C9.2@1342.52,3169.29 C9.2 ; v1@1645.67,3234.25 v1(1645.67,3248.03) ; 1685.04,1783.46 1688.98,1779.53 ; 1685.04,1830.61 1685.13,1830.61 ; 1685.04,1917.42 1685.13,1917.42
  Bottom Layer w20: C8.2 1342.52,2771.65 1397.64,2716.54 1858.27,2716.54 1858.27,2452.76 1775.59,2370.08 1736.22,2370.08 1685.04,2318.9 1685.04,1917.42 ; C8.2@1346.46,3003.94 C9.2 ; v1(1385.83,2598.43) C1.2 ; 1555.12,1779.53 1685.04,1779.53 ; 1590.55,1279.53 1968.11,1279.53 1968.11,1358.66 1929.13,1397.64 1771.65,1397.64 1732.28,1437.01 1732.28,1582.68 1732.28,1779.53 ; 1685.04,1783.46 1685.04,1830.61 ; 1685.13,1830.61 1685.13,1917.42 ; 1688.98,1779.53 1732.28,1779.53 ; v1(1787.4,1779.53) 1732.28,1779.53 ; 2736.22,1141.73 2803.15,1074.8 2858.27,1074.8 v1(2933.07,1000)
  Bottom Layer w25: C9.2@1342.52,3169.29 1342.52,3234.25 ; R5.2 1342.52,3234.25 ; C6.2 C7.2 v1(1606.3,803.15) ; v1@1645.67,3234.25 1342.52,3234.25
  Bottom Layer w30: J1.2 484.25,3889.76 377.95,3889.76 287.23,3799.04 287.23,2885.83 641.73,2885.83 700.79,2826.77 700.79,1543.31 751.97,1492.13 R2.2@834.65,1492.13 ; R2.2 834.65,1338.58 1051.18,1122.05 ; R1.2 1248.03,1318.9 1051.18,1122.05 ; C6.2 1267.72,905.51 1051.18,1122.05 ; C1.2 C2.2 C3.2
pads on no net: J1.6 LCD1.0 LCD1.6 LCD1.9 LCD1.14 LCD1.15 LCD1.16 LCD1.17 LCD1.18 LCD1.19 LCD1.20 LCD1.21 LCD1.32 LCD1.40 U1.1 U1.2 U1.3 U1.17 U1.18 U1.19 U1.20 U1.21 U1.22 U1.23 U1.24 U1.25 U2.8 U2.11 U2.12 U3.2 U3.3 U3.4 U3.5 U3.12 U3.13 U3.25 U3.26 U3.27 U3.33 U3.34 U3.39 U3.40 U3.41

## Other copper
Top Layer:
  text "-" at 3866.14,2192.91 h300
  text "+" at 192.91,2157.48 h300
  text "+" at 3877.95,1610.24 h300
  text "-" at 185.04,1578.74 h300
  text "Pong game" at 118.11,566.93 h118.11
  text "Ver .PcbRevision" at 3165.35,468.5 h118.11
  text ".PcbDate" at 114.17,362.2 h118.11
  text "H" at 94.49,149.61 h500
  text ".PcbDesigner" at 3185.04,59.06 h118.11

## Silkscreen, mask and mechanical layers (free items; w line width, h text height)
Mechanical 1:
  lines w5.91: -3.94,3937.01 4240.16,3937.01 ; 0,3937.01 0,0 4244.09,0 4244.09,3937.01
Drill Drawing:
  circle w10: c100.62,4705.52 r33.33
  lines w10: 67.29,4255.52 100.62,4222.18 133.96,4255.52 100.62,4288.85 67.29,4255.52 ; 67.29,4372.18 133.96,4372.18 133.96,4438.85 67.29,4438.85 67.29,4372.18 ; 67.29,4588.85 133.96,4588.85 100.62,4522.18 67.29,4588.85 ; 67.29,4822.18 100.62,4838.85 133.96,4822.18 117.29,4855.52 133.96,4888.85 100.62,4872.18 67.29,4888.85 83.96,4855.52 67.29,4822.18 ; 67.29,4988.85 83.96,4988.85 100.62,4972.18 117.29,4988.85 133.96,4988.85 117.29,5005.52 133.96,5022.18 117.29,5022.18 100.62,5038.85 83.96,5022.18 67.29,5022.18 83.96,5005.52 67.29,4988.85
  lines w15: 7.5,4177.18 11292.33,4177.18 ; 7.5,5077.18 11292.33,5077.18 ; 558.38,4027.18 558.38,5227.18 ; 1098.24,4027.18 1098.24,5227.18 ; 2197.92,4027.18 2197.92,5227.18 ; 2703.79,4027.18 2703.79,5227.18 ; 3437.59,4027.18 3437.59,5227.18 ; 4937.14,4027.18 4937.14,5227.18 ; 5526.99,4027.18 5526.99,5227.18 ; 6616.68,4027.18 6616.68,5227.18 ; 7726.35,4027.18 7726.35,5227.18 ; 8580.12,4027.18 8580.12,5227.18 ; 9913.72,4027.18 9913.72,5227.18 ; 7.5,4027.18 11292.33,4027.18 11292.33,5227.18 7.5,5227.18 7.5,4027.18
  text "Symbol" at 97.5,5122.18 h72
  text "Count" at 603.38,5122.18 h72
  text "Hole Size" at 1143.24,5122.18 h72
  text "Plated" at 2242.92,5122.18 h72
  text "Hole Type" at 2748.79,5122.18 h72
  text "Drill Layer Pair" at 3482.59,5122.18 h72
  text "Via/Pad" at 4982.14,5122.18 h72
  text "Pad Shape" at 5571.99,5122.18 h72
  text "Template" at 6661.68,5122.18 h72
  text "Description" at 7771.35,5122.18 h72
  text "Hole Tolerance (+)" at 8625.12,5122.18 h72
  text "Hole Tolerance (-)" at 9958.72,5122.18 h72
  text "3" at 603.38,4972.18 h60
  text "1.100mm (43.31mil)" at 1143.24,4972.18 h60
  text "PTH" at 2242.92,4972.18 h60
  text "Round" at 2748.79,4972.18 h60
  text "Top Layer - Bottom Layer" at 3482.59,4972.18 h60
  text "Pad" at 4982.14,4972.18 h60
  text "Rounded" at 5571.99,4972.18 h60
  text "c110h110m-1p2650" at 6661.68,4972.18 h60
  text "4" at 603.38,4822.18 h60
  text "0.250mm (9.84mil)" at 1143.24,4822.18 h60
  text "PTH" at 2242.92,4822.18 h60
  text "Round" at 2748.79,4822.18 h60
  text "Top Layer - Bottom Layer" at 3482.59,4822.18 h60
  text "Via" at 4982.14,4822.18 h60
  text "Rounded" at 5571.99,4822.18 h60
  text "v60h25" at 6661.68,4822.18 h60
  text "4" at 603.38,4672.18 h60
  text "1.000mm (39.37mil)" at 1143.24,4672.18 h60
  text "PTH" at 2242.92,4672.18 h60
  text "Round" at 2748.79,4672.18 h60
  text "Top Layer - Bottom Layer" at 3482.59,4672.18 h60
  text "Pad" at 4982.14,4672.18 h60
  text "Rounded" at 5571.99,4672.18 h60
  text "c200h100" at 6661.68,4672.18 h60
  text "6" at 603.38,4522.18 h60
  text "0.800mm (31.50mil)" at 1143.24,4522.18 h60
  text "PTH" at 2242.92,4522.18 h60
  text "Round" at 2748.79,4522.18 h60
  text "Top Layer - Bottom Layer" at 3482.59,4522.18 h60
  text "Pad" at 4982.14,4522.18 h60
  text "Rounded Rectangle" at 5571.99,4522.18 h60
  text "r122_173h80r50" at 6661.68,4522.18 h60
  text "8" at 603.38,4372.18 h60
  text "2.200mm (86.61mil)" at 1143.24,4372.18 h60
  text "PTH" at 2242.92,4372.18 h60
  text "Round" at 2748.79,4372.18 h60
  text "Top Layer - Bottom Layer" at 3482.59,4372.18 h60
  text "Pad" at 4982.14,4372.18 h60
  text "Rounded Rectangle" at 5571.99,4372.18 h60
  text "s800h220r50o200_0" at 6661.68,4372.18 h60
  text "47" at 603.38,4222.18 h60
  text "0.900mm (35.43mil)" at 1143.24,4222.18 h60
  text "PTH" at 2242.92,4222.18 h60
  text "Round" at 2748.79,4222.18 h60
  text "Top Layer - Bottom Layer" at 3482.59,4222.18 h60
  text "Via" at 4982.14,4222.18 h60
  text "Rounded" at 5571.99,4222.18 h60
  text "v150h90" at 6661.68,4222.18 h60
  text "72 Total" at 603.38,4072.18 h60